# Altium PCB DCDC_Buck_Boost.PcbDoc
Units mm, origin at the board's own origin, x right, y up, seen from the top; angles counter-clockwise.
Board outline 45.9 x 65.1 mm, 2 copper layers (Component Side, Bottom Layer), stack 0.325 mm thick; 28 components, 22 nets, 112 pads, 15 vias.
Unrouted connection lines stored in the file: 4.
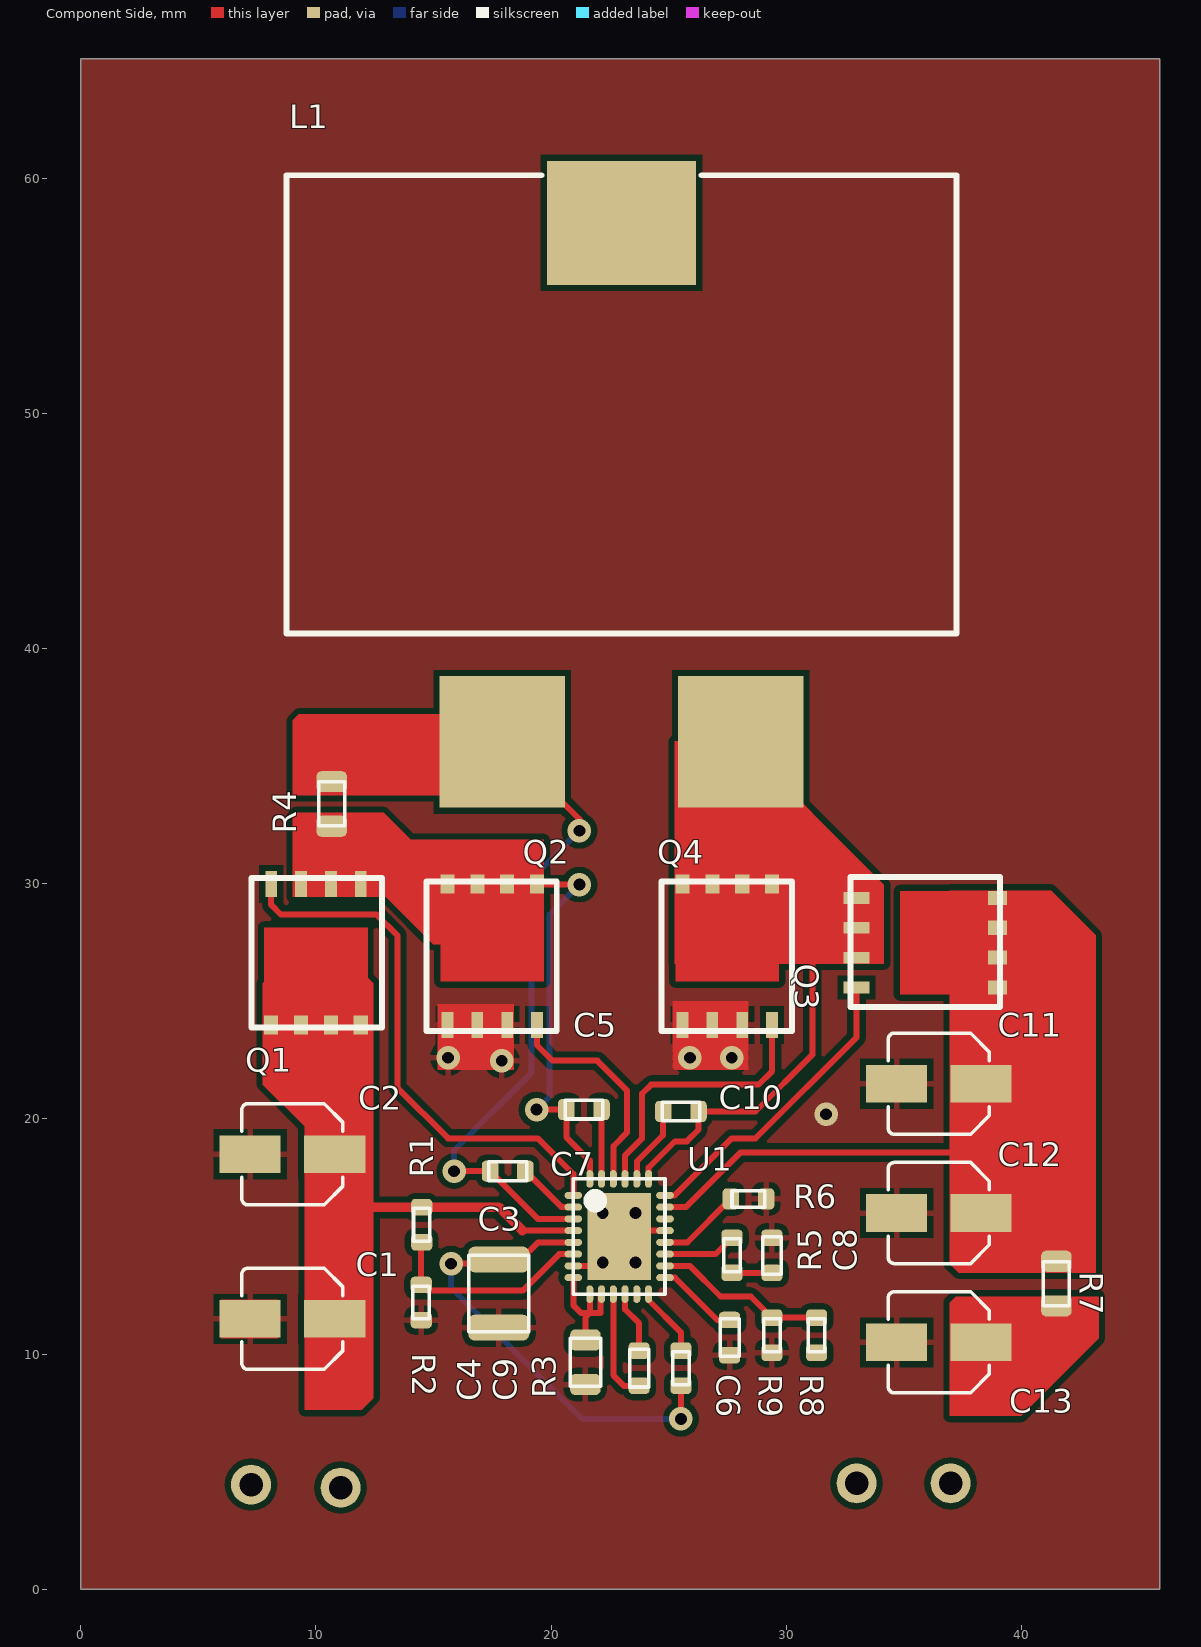
[diagram p0: Component Side view]
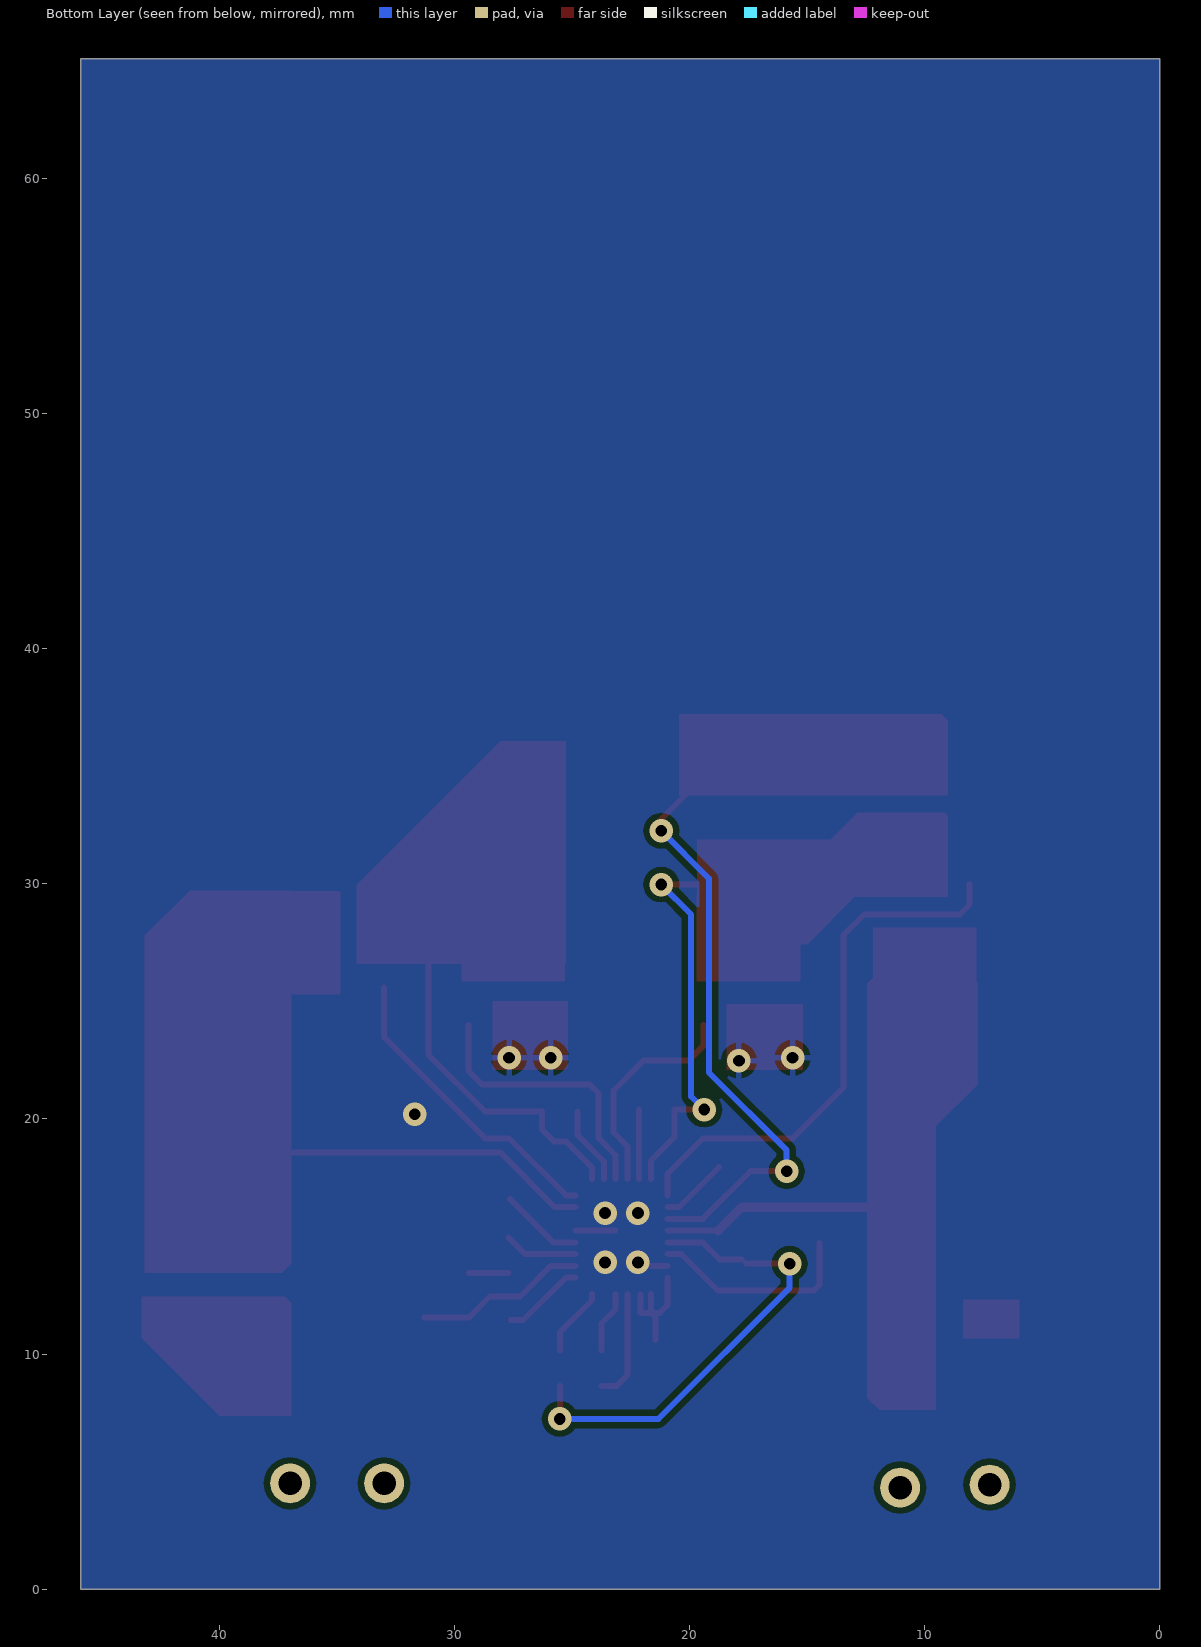
[diagram p1: Bottom Layer view, seen from below]
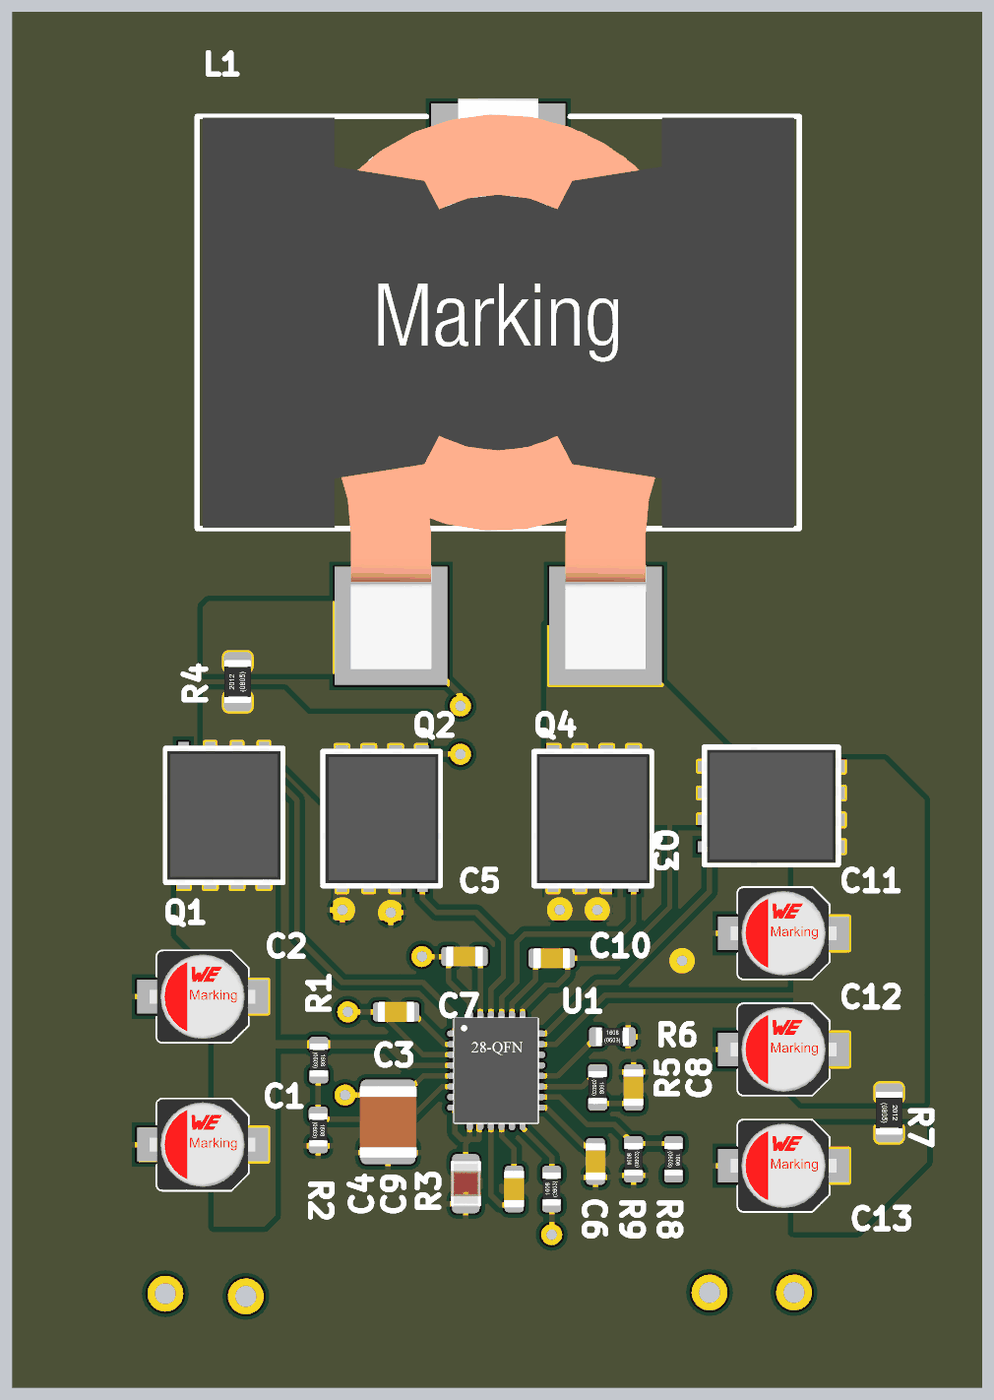
[diagram p2: 3D render of the assembled board from above, using the file's embedded part models]

## Layer stack, top to bottom
Top Solder: solder mask 0.0102, Solder Resist, Dk 3.5
Component Side: signal copper 0.0356
Dielectric 1: core 0.254, FR-4, Dk 4.2
Bottom Layer: signal copper 0.0356
Solder Side: solder mask 0.0102, Solder Resist, Dk 3.5

## Board outline
0,0 0,65.1 45.9,65.1 45.9,0

## Design rules (kind name [scope] priority, off if disabled: settings)
Clearance [All] p1: gap=0.254 ignorepadtopadclearanceinfootprint=FALSE except(0: Arc-Hole Track-Hole SMDPad-Hole THPad-Hole Via-Hole Fill-Hole Poly-Hole Region-Hole Text-Hole)
FabricationTestPointUsage TestPointUsage [All] p1: valid=0 allowmultiple=FALSE
FabricationTestpoint Testpoint [All] p1: side=3 testpointundercomponent=TRUE minsize=1.016 maxsize=2.54 preferedsize=1.524 minholesize=0 maxholesize=1.016 preferedholesize=0.813 testpointgrid=0.025 allowsidetop=TRUE allowsidebottom=TRUE usegrid=TRUE gridtolerance=0
PolygonConnect [All] p1: connectstyle=Relief reliefconductorwidth=0.254 reliefentries=4 polygonreliefangle="90 Angle" airgapwidth=0.254
RoutingVias [All] p1: holewidth=0.711 width=1.27 viastyle="Through Hole" minholewidth=0.711 minwidth=1.27 maxholewidth=0.711 maxwidth=1.27
SilkToSolderMaskClearance SilkscreenOverComponentPads [IsPad] p1: minsilkscreentomaskgap=0.254 clearancetoexposedcopper=TRUE
SolderMaskExpansion [All] p1: expansion=0.102
Width [All] p1: maxlimit=0.254 minlimit=0.254 preferedwidth=0.254
27 further rules are at their usual default settings.

## Components (designator, comment, footprint, x,y, rotation, side; value= is the part's Value field where it differs from the comment)
C1 "220uF Cap" WCAP-ASLI_4x5.5 9,11.5 r0 top
C2 "220uF Cap" WCAP-ASLI_4x5.5 9,18.5 r0 top
C3 "4.7uF/50V" CAPC3225X30 17.78,12.573 r90 top
C4 "470nF/50V" CAPC2012X15 21.463,9.652 r90 top
C5 "100nF/50V" CAPC1608X10 21.4,20.4 r0 top
C6 "100nF/50V" CAPC1608X10 27.6,10.7 r270 top
C7 "10nF/50V" CAPC1608X10 18.161,17.78 r0 top
C8 "15nF/50V" CAPC1608X10 29.4,14.2 r90 top
C9 "10nF/50V" CAPC1608X10 23.749,9.398 r90 top
C10 "100nF/50V" CAPC1608X10 25.527,20.32 r180 top
C11 "470uF Cap" WCAP-ASLL_4x5.5 36.5,21.5 r0 top
C12 "470uF Cap" WCAP-ASLL_4x5.5 36.5,16 r0 top
C13 "470uF Cap" WCAP-ASLL_4x5.5 36.5,10.5 r0 top
L1 "10uH" WE-HCF_2818 23,47.5 r0 top value="10 uH"
Q1 "BSC014N04LSI" TDSON-8-FL 10,27 r180 top
Q2 "BSC014N04LSI" TDSON-8-FL 17.5,27 r0 top
Q3 "BSC009NE2LS5I" TDSON-8-FL 36,27.5 r270 top
Q4 "BSC009NE2LS5I" TDSON-8-FL 27.5,27 r0 top
R1 "220k/1%" RESC1608X05 14.5,15.5 r270 top
R2 "64k9/1%" RESC1608X05 14.478,12.192 r270 top
R3 "100k/1%" RESC1608X05 25.527,9.398 r90 top
R4 "0R/0" RESC2012X05 10.668,33.401 r90 top
R5 "15k/1%" RESC1608X05 27.7,14.2 r270 top
R6 "294k/1%" RESC1608X05 28.4,16.6 r0 top
R7 "0R/0" RESC2012X05 41.5,13 r270 top
R8 "41k2/1%" RESC1608X05 31.3,10.8 r270 top
R9 "1k8/1%" RESC1608X05 29.4,10.8 r90 top
U1 "LT8390" LT3890 22.9,15 r270 top

## Footprints (in the part's own frame and the unit in brackets; to place one, negate y for a bottom-side part, rotate by r counter-clockwise, add the part's x,y. Pads: shape width x height; smd on the part's side, far side on the other; paste and mask are expansions set on the pad)
CAPC1608X10 [mm] "CHIP KERKO 0603 #G#"
  rrect50% 0.7x0.9 smd: 1(-0.75,0) 2(0.75,0)
  silkscreen extent -0.8,-0.4 0.8,0.4, body extent -0.87,-0.47 0.88,0.48, height 1
CAPC2012X15 [mm] "CHIP KERKO 0805 #G#"
  rrect50% 0.9x1.3 smd: 1(-0.95,0) 2(0.95,0)
  silkscreen extent -1.02,-0.65 1.02,0.65, body extent -1.1,-0.72 1.1,0.73, height 1.5
CAPC3225X30 [mm] "CHIP KERKO 1210 #G#"
  rrect50% 1.1x2.6 smd: 1(-1.45,0) 2(1.45,0)
  silkscreen extent -1.63,-1.28 1.63,1.28, body extent -1.7,-1.35 1.7,1.35, height 3
LT3890 [mm] "QFN28 4.0X4.0 mit Kühlfläche #G#"
  oval 0.3x0.75 smd: 1(-1.75,-1.95) 2(-1.25,-1.95) 3(-0.75,-1.95) 4(-0.25,-1.95) 5(0.25,-1.95) 6(0.75,-1.95) 7(1.25,-1.95) 8(1.75,-1.95) 15(1.75,1.95) 16(1.25,1.95) 17(0.75,1.95) 18(0.25,1.95) 19(-0.25,1.95) 20(-0.75,1.95) 21(-1.25,1.95) 22(-1.75,1.95)
  oval 0.75x0.3 smd: 9(2.45,-1.25) 10(2.45,-0.75) 11(2.45,-0.25) 12(2.45,0.25) 13(2.45,0.75) 14(2.45,1.25) 23(-2.45,1.25) 24(-2.45,0.75) 25(-2.45,0.25) 26(-2.45,-0.25) 27(-2.45,-0.75) 28(-2.45,-1.25)
  rect 3.7x2.7 smd: M1(0,0)
  silkscreen extent -2.45,-1.95 2.45,1.95, body extent -2.56,-2.07 2.54,2.03, height 0.76
RESC1608X05 [mm] "CHIP 0603 WID #G#"
  rrect50% 0.7x0.9 smd: 1(-0.75,0) 2(0.75,0)
  silkscreen extent -0.7,-0.35 0.7,0.35, body extent -0.77,-0.42 0.78,0.43, height 0.46
RESC2012X05 [mm] "CHIP 0805 WID #G#"
  rrect50% 0.9x1.3 smd: 1(-0.95,0) 2(0.95,0)
  silkscreen extent -0.92,-0.55 0.95,0.55, body extent -1,-0.62 1,0.63, height 0.46
TDSON-8-FL [mm] "Super SO8"
  rect 0.5x1.1 smd: 1(-1.905,-3) 2(-0.635,-3) 3(0.635,-3) 4(1.905,-3)
  rect 0.6x0.8 smd: 5(1.905,3) 6(0.635,3) 7(-0.635,3) 8(-1.905,3)
  Component Side region: -2.205,-1.15 2.205,-1.15 2.205,2.6 -2.205,2.6
  Component Side region: -2.315,-3.05 0.885,-3.05 0.885,-2.45 -2.315,-2.45
  silkscreen extent -2.81,-3.25 2.75,3.1, body extent -2.8,-3.25 2.79,3.1, height 1.1
WCAP-ASLI_4x5.5 [mm] "Aluminium Electrolytic V-Chip SMT Capacitors, §¶4x5.5mm"
  rect 2.6x1.6 smd: 1(1.8,0) 2(-1.8,0)
  silkscreen extent -2.15,-2.15 2.15,2.15, body extent -2.5,-2.15 2.5,2.15, height 5.5
WCAP-ASLL_4x5.5 [mm] "Aluminium Electrolytic V-Chip SMT Capacitors, §¶4x5.5mm"
  rect 2.6x1.6 smd: 1(1.8,0) 2(-1.8,0)
  silkscreen extent -2.15,-2.15 2.15,2.15, body extent -2.5,-2.15 2.5,2.15, height 5.5
WE-HCF_2818 [mm] "SMD High Current Inductor, size 2818"
  rect 5.33x5.59 smd: 1(-5.075,-11.455) 2(5.075,-11.455)
  rect 6.35x5.28 smd: 3(0,10.62)
  silkscreen extent -14.25,-6.85 14.25,12.65, body extent -14,-13.5 14,13.5, height 18.55

## Part data
C1 C2: Capacitance="220 uF", ESR="0.23 Ohm"
C3: library part 0444.00103, Manufacturer=Murata, Package=1210, Part_Value=4.7uF, Temperature max=125°C, Temperature min=-55°C, Tolerance=10%, Voltage=50V, Automotive=YES, ComponentLink1Description=Murata_GCM_Datasheet_03.2014.pdf, ComponentLink1URL=D:\__Altium\03_AVL_EHW_Comp_Lib\Datasheet\0444_Capacitor_Ceramic\Murata_GCM_Datasheet_03.2014.pdf, Mount=SMD, Ordering Code=GCM32ER71H475KA55L, Part_Number=0444.00103, Type=X7R
C4: library part 0444.00090, Manufacturer=Murata, Package=0805, Part_Value=470nF, Temperature max=125°C, Temperature min=-55°C, Tolerance=10%, Voltage=50V, Automotive=YES, ComponentLink1Description=Murata_GCM_Datasheet_03.2014.pdf, ComponentLink1URL=D:\__Altium\03_AVL_EHW_Comp_Lib\Datasheet\0444_Capacitor_Ceramic\Murata_GCM_Datasheet_03.2014.pdf, Component State="Development released", Mount=SMD, Ordering Code=GCM21BR71H474KA55L, Part_Number=0444.00090, Part_Number_old=CC0095, Type=X7R
C5 C6 C10: library part 0444.00073, Manufacturer=Murata, Package=0603, Part_Value=100nF, Temperature max=125°C, Temperature min=-55°C, Tolerance=10%, Voltage=50V, Automotive=YES, ComponentLink1Description=Murata_GCM_Datasheet_03.2014.pdf, ComponentLink1URL=D:\__Altium\03_AVL_EHW_Comp_Lib\Datasheet\0444_Capacitor_Ceramic\Murata_GCM_Datasheet_03.2014.pdf, Component State="Development released", Mount=SMD, Ordering Code=GCM188R71H104KA57D, Part_Number=0444.00073, Part_Number_old=CC0071, Type=X7R
C7 C9: library part 0444.00053, Manufacturer=Murata, Package=0603, Part_Value=10nF, Temperature max=125°C, Temperature min=-55°C, Tolerance=10%, Voltage=50V, Automotive=YES, ComponentLink1Description=Murata_GCM_Datasheet_03.2014.pdf, ComponentLink1URL=D:\__Altium\03_AVL_EHW_Comp_Lib\Datasheet\0444_Capacitor_Ceramic\Murata_GCM_Datasheet_03.2014.pdf, Component State="Development released", Mount=SMD, Ordering Code=GCM188R71H103KA37D, Part_Number=0444.00053, Part_Number_old=CC0101, Type=X7R
C8: library part 0444.00059, Manufacturer=Murata, Package=0603, Part_Value=15nF, Temperature max=125°C, Temperature min=-55°C, Tolerance=10%, Voltage=50V, Automotive=YES, ComponentLink1Description=Murata_GCM_Datasheet_03.2014.pdf, ComponentLink1URL=D:\__Altium\03_AVL_EHW_Comp_Lib\Datasheet\0444_Capacitor_Ceramic\Murata_GCM_Datasheet_03.2014.pdf, Mount=SMD, Ordering Code=GCM188R71H153KA37D, Part_Number=0444.00059, Type=X7R
C11 C12 C13: Capacitance="470 uF", ESR="66 mOhm"
L1: "WE-HCF SMD High Current Inductor, size 2818, 10 uH", Part Number=7443641000, Rated Current="30 A", ComponentLink1Description=Manufacturer, ComponentLink1URL=http://www.we-online.de, ComponentLink2Description=Datasheet, ComponentLink2URL=http://katalog.we-online.de/pbs/datasheet/7443641000.pdf, Published Date="May 2017", Publisher="Wurth Elektronik", Size=2818
R1: library part 0440.00197, Manufacturer=Vishay, Package=0603, Part_Value=220k, Power=0.1W, Temperature coefficient=TK100, Temperature max=155°C, Temperature min=-55°C, Tolerance=1%, Voltage=75V, Automotive=YES, ComponentLink1Description=Vishay_DCRCWE3_Datasheet_04.06.12.pdf, ComponentLink1URL=D:\__Altium\03_AVL_EHW_Comp_Lib\Datasheet\0440_Resistor_fixed\Vishay_DCRCWE3_Datasheet_04.06.12.pdf, Component State="Development released", Mount=SMD, Ordering Code=CRCW0603220KFKEA, Part_Number=0440.00197, Part_Number_old=RE0222, Type="THICK FILM"
R2: library part 0440.00282, Manufacturer=Vishay, Package=0603, Part_Value=64k9, Power=0.1W, Temperature coefficient=TK100, Temperature max=155°C, Temperature min=-55°C, Tolerance=1%, Voltage=75V, Automotive=YES, ComponentLink1Description=Vishay_DCRCWE3_Datasheet_04.06.12.pdf, ComponentLink1URL=D:\__Altium\03_AVL_EHW_Comp_Lib\Datasheet\0440_Resistor_fixed\Vishay_DCRCWE3_Datasheet_04.06.12.pdf, Mount=SMD, Ordering Code=CRCW060364K9FKEA, Part_Number=0440.00282, Type="THICK FILM"
R3: library part 0440.00176, Manufacturer=Vishay, Package=0603, Part_Value=100k, Power=0.1W, Temperature coefficient=TK100, Temperature max=155°C, Temperature min=-55°C, Tolerance=1%, Voltage=75V, Automotive=YES, ComponentLink1Description=Vishay_DCRCWE3_Datasheet_04.06.12.pdf, ComponentLink1URL=D:\__Altium\03_AVL_EHW_Comp_Lib\Datasheet\0440_Resistor_fixed\Vishay_DCRCWE3_Datasheet_04.06.12.pdf, Component State="Development released", Mount=SMD, Ordering Code=CRCW0603100KFKEA, Part_Number=0440.00176, Part_Number_old=RE0269, Type="THICK FILM"
R4 R7: library part 0440.00003, Manufacturer=Vishay, Package=0805, Part_Value=0R, Power=0.125W, Temperature coefficient=TK100, Temperature max=155°C, Temperature min=-55°C, Tolerance=0, Voltage=150V, Automotive=YES, ComponentLink1Description=Vishay_DCRCWE3_Datasheet_04.06.12.pdf, ComponentLink1URL=D:\__Altium\03_AVL_EHW_Comp_Lib\Datasheet\0440_Resistor_fixed\Vishay_DCRCWE3_Datasheet_04.06.12.pdf, Component State="Development released", Mount=SMD, Ordering Code=CRCW08050000Z0EA, Part_Number=0440.00003, Part_Number_old=RE0090, Type="THICK FILM"
R5: library part 0440.00148, Manufacturer=Vishay, Package=0603, Part_Value=15k, Power=0.1W, Temperature coefficient=TK100, Temperature max=155°C, Temperature min=-55°C, Tolerance=1%, Voltage=75V, Automotive=YES, ComponentLink1Description=Vishay_DCRCWE3_Datasheet_04.06.12.pdf, ComponentLink1URL=D:\__Altium\03_AVL_EHW_Comp_Lib\Datasheet\0440_Resistor_fixed\Vishay_DCRCWE3_Datasheet_04.06.12.pdf, Component State="Development released", Mount=SMD, Ordering Code=CRCW060315K0FKEA, Part_Number=0440.00148, Part_Number_old=RE0199, Type="THICK FILM"
R6: library part 0440.00329, Manufacturer=Vishay, Package=0603, Part_Value=294k, Power=0.1W, Temperature coefficient=TK100, Temperature max=155°C, Temperature min=-55°C, Tolerance=1%, Voltage=75V, Automotive=YES, ComponentLink1Description=Vishay_DCRCWE3_Datasheet_04.06.12.pdf, ComponentLink1URL=D:\__Altium\03_AVL_EHW_Comp_Lib\Datasheet\0440_Resistor_fixed\Vishay_DCRCWE3_Datasheet_04.06.12.pdf, Mount=SMD, Ordering Code=CRCW0603294KFKEA, Part_Number=0440.00329, Type="THICK FILM"
R8: library part 0440.00284, Manufacturer=Vishay, Package=0603, Part_Value=41k2, Power=0.1W, Temperature coefficient=TK100, Temperature max=155°C, Temperature min=-55°C, Tolerance=1%, Voltage=75V, Automotive=YES, ComponentLink1Description=Vishay_DCRCWE3_Datasheet_04.06.12.pdf, ComponentLink1URL=D:\__Altium\03_AVL_EHW_Comp_Lib\Datasheet\0440_Resistor_fixed\Vishay_DCRCWE3_Datasheet_04.06.12.pdf, Mount=SMD, Ordering Code=CRCW060341K2FKEA, Part_Number=0440.00284, Type="THICK FILM"
R9: library part 0440.00105, Manufacturer=Vishay, Package=0603, Part_Value=1k8, Power=0.1W, Temperature coefficient=TK100, Temperature max=155°C, Temperature min=-55°C, Tolerance=1%, Voltage=75V, Automotive=YES, ComponentLink1Description=Vishay_DCRCWE3_Datasheet_04.06.12.pdf, ComponentLink1URL=D:\__Altium\03_AVL_EHW_Comp_Lib\Datasheet\0440_Resistor_fixed\Vishay_DCRCWE3_Datasheet_04.06.12.pdf, Mount=SMD, Ordering Code=CRCW06031K80FKEA, Part_Number=0440.00105, Type="THICK FILM"

## Free pads (board coordinates)
  round 1.7 hole 1: 1(11.049,4.318) 1(33,4.5) 1(37,4.5) 2(7.239,4.445)

## Via types
v1: diameter 1, hole 0.5, Component Side to Bottom Layer, 15 vias

## Nets (pads, with @x,y where several pads share a name; then routed paths per layer and width w, separated by ;. In a path a pad name is that pad's centre, name@x,y a point inside that pad or via, vN(x,y) a via of type N, cw(c..) or ccw(c..) an arc to the next point about the centre after c; other vN are vias at no path point)
GND: C1.2 C2.2 C3.1 C4.1 C6.2 C8.2 C11.2 C12.2 C13.2 Q2.1 Q2.2 Q2.3 Q4.1 Q4.2 Q4.3 R2.2 R6.2 R9.1 U1.7 U1.19 U1.M1 | length 2.4
  Component Side w0.254: U1.7 U1.M1@21.65,13.75 ; U1.M1@23.15,15.25 U1.19
  other v1: 22.2,13.9 23.6,13.9 22.2,16 23.6,16 31.7,20.2 17.907,22.479 15.621,22.606 25.908,22.606 27.686,22.606
Input: C1.1 C2.1 Q1.5 Q1.6 Q1.7 Q1.8 R1.1 U1.4 | length 9.3
  Component Side w0.254: 18.786,15.25 U1.4
  Component Side w0.406: 12.071,16.25 R1.1 17.786,16.25 18.786,15.25
NetC3_2: C3.2 R3.1 U1.5 | length 19.8
  Component Side w0.254: v1(15.748,13.843) C3.2@17.6,13.843 ; C3.2 18.722,14.023 19.441,14.742 ; 19.449,14.75 U1.5 ; v1(25.527,7.239) R3.1
  Bottom Layer w0.254: v1(15.748,13.843) 15.748,12.827 21.336,7.239 v1(25.527,7.239)
NetC4_2: C4.2 U1.8 U1.9 U1.10 | length 5.3
  Component Side w0.254: U1.8 20.95,12.07 21.269,11.751 21.65,11.751 ; C4.2 21.463,11.564 21.65,11.751 ; U1.9 21.65,11.751 ; U1.10@22.098,12.529 22.098,11.751 21.65,11.751
NetC5_1: C5.1 C7.2 Q1.1 Q1.2 Q1.3 Q2.5 Q2.6 Q2.7 Q2.8 R4.1 U1.2 U1.28 | length 19.7
  Component Side w0.254: C7.2@18.753,17.95 20.453,16.25 U1.2 ; v1(19.384,20.4) C5.1 20.65,19.228 21.65,18.228 U1.28 ; Q2.5 19.424,29.981 21.2,29.981 v1(21.209,29.972)
  Bottom Layer w0.254: v1(19.384,20.4) 19.939,20.955 19.939,28.702 v1(21.209,29.972)
NetC5_2: C5.2 U1.27 | length 3
  Component Side w0.254: U1.27 C5.2
NetC6_1: C6.1 U1.15 | length 3.5
  Component Side w0.254: U1.15 25.273,13.25 27.073,11.45 C6.1
NetC7_1: C7.1 L1.1 R4.2 U1.3 | length 27.8
  Component Side w0.254: v1(15.875,17.78) C7.1 19.441,15.75 U1.3 ; L1.1 21.209,32.761 v1(21.209,32.258)
  Bottom Layer w0.254: v1(15.875,17.78) 15.875,18.669 19.177,21.971 19.177,30.226 v1(21.209,32.258)
NetC8_1: C8.1 R5.2 | length 1.7
  Component Side w0.254: R5.2 C8.1
NetC9_1: C9.1 C11.1 C12.1 Q3.5 Q3.6 Q3.7 Q3.8 R7.1 U1.11 U1.21 | length 25.4
  Component Side w0.254: U1.11 22.65,9.1 23.102,8.648 C9.1 ; U1.21 25.738,16.25 28.067,18.579 37.628,18.579 38.3,17.907 C12.1 39.568,14.732 40.718,14.732 R7.1
NetC10_1: C10.1 L1.2 Q3.1 Q3.2 Q3.3 Q4.5 Q4.6 Q4.7 Q4.8 U1.23 | length 14.2
  Component Side w0.254: U1.23 24.15,17.927 25.273,19.05 25.781,19.05 26.277,19.546 C10.1 28.702,20.32 31.115,22.733 31.115,27.051
NetC10_2: C10.2 U1.24 | length 3.3
  Component Side w0.254: U1.24 23.65,18.189 24.765,19.304 24.765,20.308 C10.2
NetQ1_4: Q1.4 U1.1 | length 23.2
  Component Side w0.254: Q1.4 8.095,29.116 8.509,28.702 12.573,28.702 13.462,27.813 13.462,21.336 15.621,19.177 19.431,19.177 20.95,17.658 U1.1
NetQ2_4: Q2.4 U1.26 | length 9.5
  Component Side w0.254: Q2.4 19.405,23.14 20.066,22.479 21.971,22.479 23.241,21.209 23.241,19.431 22.658,18.848 22.658,18.84 ; U1.26 22.65,18.84
NetQ3_4: Q3.4 U1.22 | length 13.1
  Component Side w0.254: U1.22 25.259,16.75 27.686,19.177 28.702,19.177 33,23.475 Q3.4
NetQ4_4: Q4.4 U1.25 | length 11.8
  Component Side w0.254: U1.25 23.15,18.451 ; 23.158,18.459 23.876,19.177 23.876,21.082 24.257,21.463 28.829,21.463 29.405,22.039 Q4.4
NetR1_2: R1.2 R2.1 U1.6 | length 9
  Component Side w0.254: R1.2@14.478,14.728 R2.1 14.72,12.7 18.796,12.7 20.346,14.25 U1.6
NetR3_2: R3.2 U1.14 | length 3
  Component Side w0.254: U1.14 24.15,12.299 25.527,10.922 R3.2
NetR5_1: R5.1 U1.17 | length 3.1
  Component Side w0.254: U1.17 27,14.25 R5.1
NetR6_1: R6.1 U1.18 | length 3.6
  Component Side w0.254: U1.18 25.8,14.75 ; 25.8,14.758 25.808,14.758 R6.1
NetR8_1: R8.1 R9.2 U1.16 | length 7.4
  Component Side w0.254: U1.16 25.908,13.75 27.212,12.446 28.504,12.446 R9.2 R8.1
Output: C9.2 C13.1 R7.2 R8.2 U1.12 | length 6.8
  Component Side w0.254: U1.12 23.15,11.902 23.749,11.303 C9.2 ; C13.1 40.472,10.5 41.5,11.528 R7.2
pads on no net: L1.3 U1.13 U1.20

## Polygon pours and split planes (outlines as drawn)
GND on Bottom Layer "Bottom Layer-No Net" (solid, pour order 2): 0,65.1 45.9,65.1 45.9,0 0,0
GND on Component Side "Component Side-No Net" (solid, pour order 4): 0,65.1 45.9,65.1 45.9,0 0,0

## Other copper
Component Side:
  rectangle net GND: 5.969,10.668 8.382,12.319
  region net GND: 25.185,25.019 25.185,22.186 25.273,22.098 28.385,22.098 28.385,25.019
  region net GND: 15.185,24.892 15.185,22.098 18.415,22.098 18.415,24.892
  region net Output: 36.957,7.366 36.957,12.192 37.211,12.446 43.307,12.446 43.307,10.668 40.005,7.366
  region net NetC9_1: 36.957,29.718 36.957,13.843 37.338,13.462 43.18,13.462 43.18,27.813 41.275,29.718
  region net NetC10_1: 25.273,36.068 25.273,26.615 34.163,26.615 34.163,29.972 28.067,36.068
  region net NetC7_1: 9.017,33.782 20.447,33.782 20.447,37.211 9.271,37.211 9.017,36.957
  region net Input: 9.525,7.62 9.525,19.685 7.747,21.463 7.747,25.781 8.001,26.035 12.192,26.035 12.446,25.781 12.446,8.128 11.938,7.62
  region net NetC5_1: 9.017,32.893 9.144,33.02 12.88,33.02 14.023,31.877 19.685,31.877 19.685,27.432 14.986,27.432 12.968,29.45 9.017,29.45

## Silkscreen, mask and mechanical layers (free items; w line width, h text height)
Mechanical 2:
  lines w0.254: 0,0 0,65 46,65 46,0 0,0
Mechanical 16_Frame:
  drawing of 1089 lines, arcs and shapes, not listed
  text "Project Title:" at 116.6,-82.9 h1.2
  text ".ProjectTitle" at 128.6,-82.9 h1.5
  text "Sample:" at 116.6,-90.9 h1.2
  text ".ProjectSample" at 123.6,-90.9 h1.5
  text "Drawing no:" at 116.6,-93.9 h1.2
  text ".PCBUnassembledNo" at 127.1,-93.9 h1.5
  text "Revision:" at 154.6,-93.9 h1.2
  text ".PCBRevision" at 162.6,-93.9 h1.5
  text "State:" at 177.1,-93.9 h1.2
  text ".PCBState" at 183.1,-93.9 h1.5
  text "Drawn by:" at 116.6,-96.9 h1.2
  text ".PCBDrawnBy" at 128.1,-96.9 h1.5
  text "on:" at 154.6,-96.9 h1.2
  text ".PCBDrawnDate" at 159.1,-96.9 h1.5
  text ".Print_Scale" at 177.1,-96.9 h1.5
  text "COPYRIGHT AVL SOFTWARE AND FUNCTIONS GMBH, ALL RIGHTS RESERVED - THIS DRAWING IS THE PROPERTY OF AVL SOFTWARE AND FUNCTIONS GMBH AND MAY NOT BE REPRODUCED IN ANY FORM," at -172.4,-99.9 h1.2
  text "Approved by:" at 116.6,-99.9 h1.2
  text ".PCBApprovedBy" at 128.1,-99.9 h1.5
  text "on:" at 154.6,-99.9 h1.2
  text ".PCBApprovalDate" at 159.1,-99.9 h1.5
  text ".Pcb_File_Name_No_Path" at 177.1,-99.9 h1.5
  text "EITHER IN WHOLE OR IN PART, OR MADE AVAILABLE TO ANY THIRD PARTY OR USED FOR MANUFACTURING OR ANY OTHER PURPOSE WITHOUT THE PRIOR WRITTEN PERMISSION OF AVL SOFTWARE AND FUNCTIONS GMBH." at -172.4,-101.9 h1.2
  text "Template: A3_AVL.PCBDOC   Revision: 1.9" at 176.6,-102.4 h0.8
Mechanical 17:
  drawing of 261 lines, arcs and shapes, not listed
  text "Layer" at 102.359,148.554 h1.52
  text "Name" at 111.205,148.554 h1.52
  text "Material" at 130.629,148.554 h1.52
  text "Thickness" at 147.455,148.554 h1.52
  text "Constant" at 160.589,148.554 h1.52
  text "Board Layer Stack" at 173.105,148.554 h1.52
  text "1" at 102.359,145.506 h1.52
  text "Top Overlay" at 111.205,145.506 h1.52
  text "2" at 102.359,142.458 h1.52
  text "Top Solder" at 111.205,142.458 h1.52
  text "Solder Resist" at 130.629,142.458 h1.52
  text "0,020mm" at 147.455,142.458 h1.52
  text "3,5" at 160.589,142.458 h1.52
  text "3" at 102.359,139.41 h1.52
  text "Top Layer" at 111.205,139.41 h1.52
  text "Copper" at 130.629,139.41 h1.52
  text "0,035mm" at 147.455,139.41 h1.52
  text "4" at 102.359,136.362 h1.52
  text "Prepreg 1" at 111.205,136.362 h1.52
  text "FR-4" at 130.629,136.362 h1.52
  text "0,360mm" at 147.455,136.362 h1.52
  text "4,2" at 160.589,136.362 h1.52
  text "5" at 102.359,133.314 h1.52
  text "Signal Layer 1" at 111.205,133.314 h1.52
  text "Copper" at 130.629,133.314 h1.52
  text "0,035mm" at 147.455,133.314 h1.52
  text "6" at 102.359,130.266 h1.52
  text "Core" at 111.205,130.266 h1.52
  text "FR-4" at 130.629,130.266 h1.52
  text "0,700mm" at 147.455,130.266 h1.52
  text "4,7" at 160.589,130.266 h1.52
  text "7" at 102.359,127.218 h1.52
  text "Signal Layer 2" at 111.205,127.218 h1.52
  text "Copper" at 130.629,127.218 h1.52
  text "0,035mm" at 147.455,127.218 h1.52
  text "8" at 102.359,124.17 h1.52
  text "Prepreg 2" at 111.205,124.17 h1.52
  text "FR-4" at 130.629,124.17 h1.52
  text "0,360mm" at 147.455,124.17 h1.52
  text "4,2" at 160.589,124.17 h1.52
  text "9" at 102.359,121.122 h1.52
  text "Bottom Layer" at 111.205,121.122 h1.52
  text "Copper" at 130.629,121.122 h1.52
  text "0,035mm" at 147.455,121.122 h1.52
  text "10" at 102.359,118.074 h1.52
  text "Bottom Solder" at 111.205,118.074 h1.52
  text "Solder Resist" at 130.629,118.074 h1.52
  text "0,020mm" at 147.455,118.074 h1.52
  text "3,5" at 160.589,118.074 h1.52
  text "11" at 102.359,115.026 h1.52
  text "Bottom Overlay" at 111.205,115.026 h1.52
  text "REMARKS / _______" at 110.6,97.1 h2
  text "tolerances,                     +/- 0.1mm / unless otherwise specified:      details +/- 0.05mm" at 110.6,87.1 h1.5
  text "base material:                  FR4 Tg135" at 110.6,82.1 h1.5
  text "UL-listing, flammability class:  94V-0, ZPMV-2" at 110.6,77.1 h1.5
  text "temperature resistance:         -40..+105 C" at 110.6,72.1 h1.5
  text "solder resist on side TOP:      colour green / solder resist on side BOTTOM:   colour green" at 110.6,65.1 h1.5
  text "solder resist thickness:        25..35um" at 110.6,60.1 h1.5
  text "E-test: conductor breaks and short circuits must be excluded with a 100% electric inspection. Bad parts must be marked." at 110.6,47.1 h1.5
  text "Gerber file revision:           (1.1) / NC-Drill file revision:         (1.1)" at 110.6,33.6 h1.5
  text "-" at 93.1,-63.9 h1.2
  text "-" at 99.6,-63.9 h1.2
  text "-" at 112.6,-63.9 h1.2
  text "-" at 133.6,-63.9 h1.2
  text "-" at 93.1,-66.9 h1.2
  text "-" at 99.6,-66.9 h1.2
  text "-" at 112.6,-66.9 h1.2
  text "-" at 133.6,-66.9 h1.2
  text "-" at 93.1,-69.9 h1.2
  text "-" at 99.6,-69.9 h1.2
  text "-" at 112.6,-69.9 h1.2
  text "-" at 133.6,-69.9 h1.2
  text "-" at 93.1,-72.9 h1.2
  text "-" at 99.6,-72.9 h1.2
  text "-" at 112.6,-72.9 h1.2
  text "-" at 133.6,-72.9 h1.2
  text "1.1" at 93.1,-75.9 h1.2
  text "-" at 99.6,-75.9 h1.2
  text "-" at 112.6,-75.9 h1.2
  text "initial revision" at 133.6,-75.9 h1.2
  text "Rev." at 93.1,-78.9 h1.2
  text "Date" at 99.6,-78.9 h1.2
  text "Name" at 112.6,-78.9 h1.2
  text "Modification" at 133.6,-78.9 h1.2
  text "Leiterplattenzeichnung / PCB drawing" at 116.6,-86.9 h1.5
Mechanical 18:
  lines w0.127: 132.6,-91.9 132.6,-88.9
  text "Bestueckzeichnung / Placement" at 116.6,-86.9 h1.5
  text "Variant:" at 133.6,-90.9 h1.2
  text ".VariantName" at 140.6,-90.9 h1.5